# Altium PCB PCB1.PcbDoc (part 2 of 2)
Units mil, origin at the board's own origin, x right, y up, seen from the top; angles counter-clockwise.
Board outline 2301.37 x 4029.64 mil, 2 copper layers (Top Layer, Bottom Layer); 103 components, 112 nets, 474 pads, 173 vias.
Unrouted connection lines stored in the file: 1.
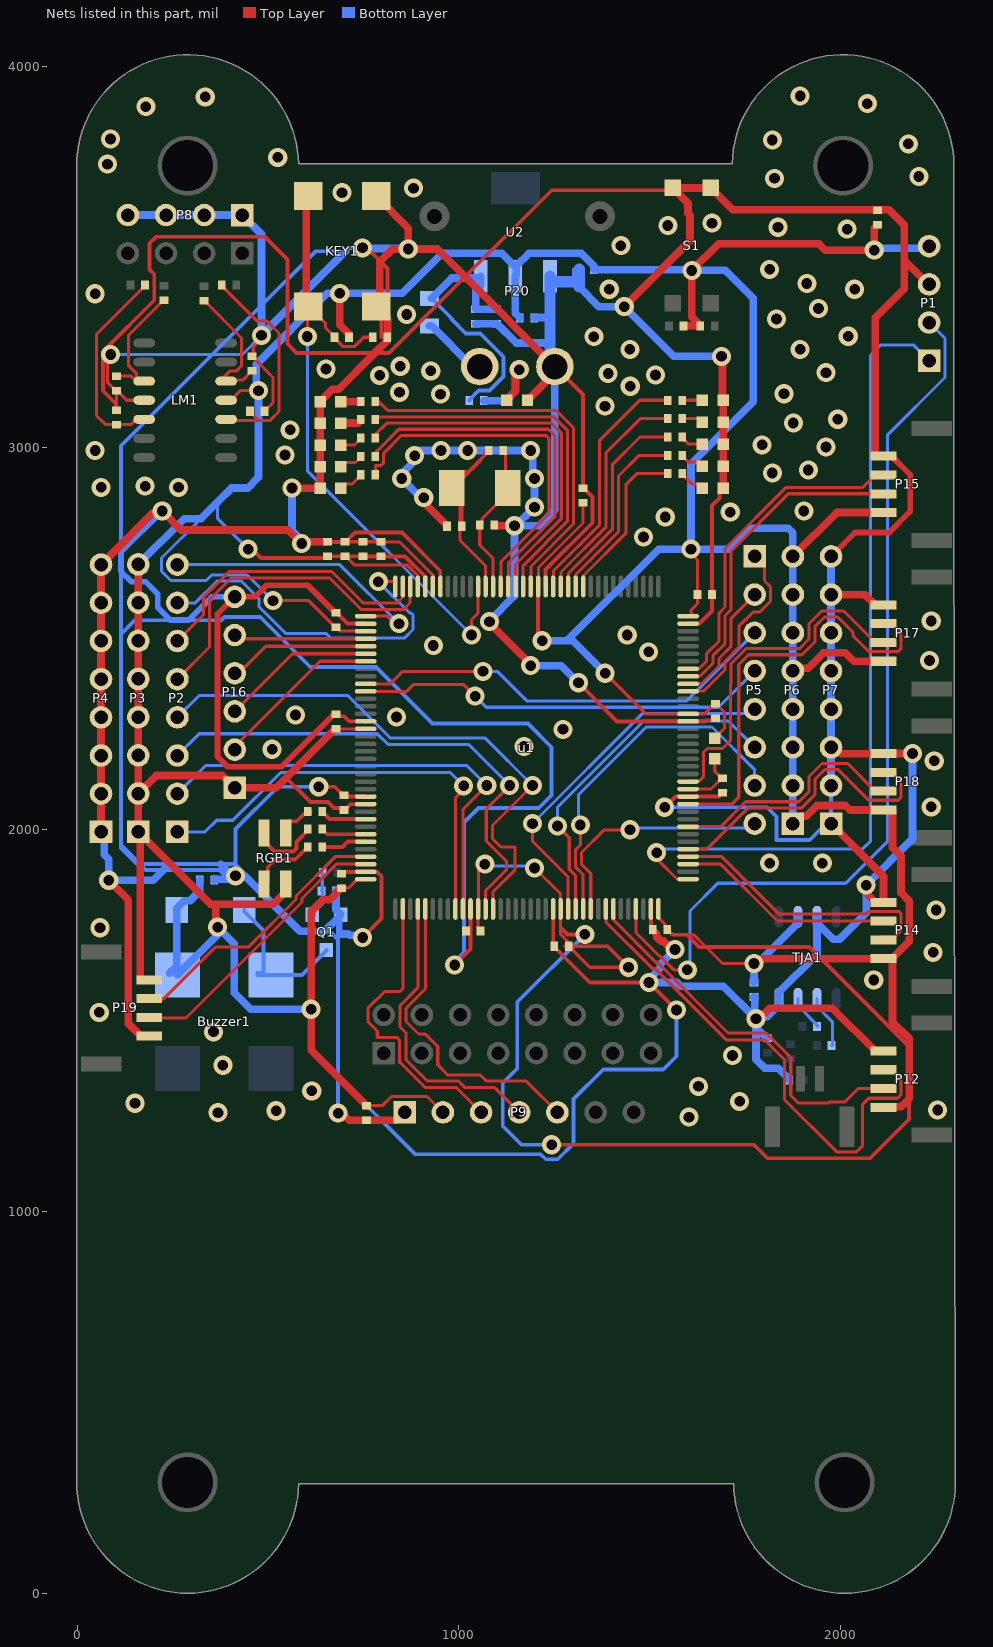
[diagram p2: the nets of this part, all layers, seen from the top]

## Via types
v1: diameter 50, hole 28, Top Layer to Bottom Layer, 173 vias

## Nets (pads, with @x,y where several pads share a name; then routed paths per layer and width w, separated by ;. In a path a pad name is that pad's centre, name@x,y a point inside that pad or via, vN(x,y) a via of type N, cw(c..) or ccw(c..) an arc to the next point about the centre after c; other vN are vias at no path point) (continued)
GND: C1.2 C2.1 C3.2 C4.2 C5.1 C6.1 C7.2 C8.1 C9.1 C10.1 C11.1 C12.1 C13.1 C14.1 C15.1 C16.1 C17.1 C18.1 C19.1 C20.1 C21.1 C22.1 C23.1 C24.1 C25.2 C26.2 C27.2 C28.2 KEY1.1 KEY1.2 LED1.2 LED2.2 LED3.2 LED4.2 LED5.2 LED6.2 LED7.2 LED8.2 LED9.2 LED10.2 LED11.2 LM1.11 P1.3 P4.1 P4.2 P4.3 P4.4 P4.5 P4.6 P4.7 P4.8 P7.1 P7.2 P7.3 P7.4 P7.5 P7.6 P7.7 P7.8 P8.1 P8.2 P8.3 P8.4 P9.1 P12.4 P14.4 P15.4 P16.6 P17.4 P18.4 P19.4 P20.2 Q1.1 R6.1 R7.1 R9.1 R10.1 R16.1 S1.1 S1.3 TJA1.3 TJA1.8 u1.16 u1.30 u1.31 u1.38 u1.51 u1.61 u1.71 u1.83 u1.94 u1.107 u1.120 u1.130 u1.143 U2.1 | length 32344.5
  Top Layer w8: v1(88,3244.66) 88,3233.29 79.19,3224.48 79.19,3171.66 101.19,3149.66 R9.1@103,3149.66 ; R6.1@101.19,3098.66 R6.1@103,3098.66 R9.1@103,3149.66 ; LM1.11@171.53,3129.66 176.12,3125.07 LM1.11@175.72,3124.66 129.81,3124.66 104.81,3149.66 R9.1@103,3149.66 ; R10.1@458,3239.66 461.37,3243.03 461.37,3263.97 483,3285.6 v1(483,3294.66) ; R10.1@461.44,3237.16 498.94,3199.66 497.7,3199.66 513,3184.36 513,3117.85 R7.1@491,3095.85 ; C24.1@795.8,2753.61 844.92,2753.61 931.59,2666.94 u1.31@931.59,2637.25
  Top Layer w10: R6.1@101.19,3098.66 101.19,3116.47 68,3149.66 68,3252.51 202.07,3386.58 202.07,3454.59 190,3466.66 190,3535.66 207,3552.66 492,3552.66 551,3493.66 551,3272.66 575,3248.66 780.27,3248.66 817,3248.66 1016.29,3447.95 1243,3674.66 1566.07,3674.66 S1.3@1666.07,3674.66 ; v1(633,2112.43) 674.73,2112.43 697.5,2089.66 C17.1@699.31,2089.66 701.85,2089.66 704.46,2087.05 755.41,2087.05 u1.61@755.76,2086.71 ; C22.1@655.64,2753.61 655.79,2753.75 701.85,2753.75 C21.1@702,2753.9 C21.1@703.81,2753.9 ; C19.1@678,2301.87 683,2296.87 699.31,2296.87 712.28,2283.9 755.41,2283.9 u1.51@755.76,2283.56 ; C20.1@678,2568.27 679.81,2568.27 694.81,2553.27 695.2,2553.27 702.81,2545.65 702.81,2545.27 708.27,2539.81 755.41,2539.81 u1.38@755.76,2539.46 ; v1(683.72,1257.38) v1@694.54,1257.38 ; C16.1@693,1884.66 697.85,1889.51 755.41,1889.51 u1.71@755.76,1889.86 756.1,1889.51 785.79,1889.51 797.3,1878 797.3,1766.91 v1(748,1717.61) ; v1(747.29,3523.72) 759.25,3523.72 793,3489.97 794.53,3488.44 813.26,3469.71 KEY1.2@813.26,3336.23 ; C24.1@795.8,2753.61 795.51,2753.9 C23.1@748.84,2753.9 C21.1@703.81,2753.9 ; KEY1.2@812,3342.27 797,3342.27 797,3289.66 C4.2@812,3289.66 812,3283.61 C4.2@813.26,3283.61 ; u1.31@931.59,2637.25 u1.31@931.94,2636.9 ; u1.30@951.62,2636.9 951.28,2637.25 951.28,2677.79 851.12,2777.95 727.87,2777.95 C21.1@703.81,2753.9 ; v1(989,1645.66) 1030.36,1687.02 1030.36,1746.48 ; C18.1@1018.54,1734.66 1030.36,1746.48 ; u1.83@1030.36,1792.42 1030.36,1746.48 ; u1.16@1227.21,2636.9 1227.21,2681.31 1349.72,2803.81 1349.72,2871.5 1342.1,2879.12 1341.72,2879.12 1326.72,2894.12 C10.1@1324.91,2894.12 1324.91,3139.33 P20.2@1251.43,3212.81 ; v1(1313,2384.66) 1414.1,2283.56 u1.130@1600.24,2283.56 1643.79,2283.56 1646.62,2286.39 1666.75,2286.39 C12.1@1671.75,2291.39 ; u1.107@1502.8,1792.42 1503.15,1792.07 1503.15,1742.91 C14.1@1507.87,1738.19 ; v1(1539,2058.66) 1567.05,2086.71 u1.120@1600.24,2086.71 1682.06,2086.71 1696.19,2100.84 C13.1@1698,2100.84 ; v1(1570,1527.66) v1(1498,1599.66) 1342.8,1599.66 1265,1677.46 ; u1.143@1600.24,2539.46 1600.59,2539.81 1630.28,2539.81 1663,2572.53 C11.1@1663,2615.61 1663,2848.73 1682.42,2868.15 1682.42,2884.6 LED2.2@1692.42,2894.6 ; C12.1@1670.71,2289.76 C12.1@1674.06,2287.62 ; P15.4@2090,2978.13 P15.4@2112.02,2978.13 ; 1265,1677.46 1246.9,1695.57 u1.94@1246.9,1792.42 1247.24,1792.07 1247.24,1701.47 1250,1701.47 C15.1@1250,1694.66 1252.35,1692.31 1252.35,1690.5 1265,1677.85 1265,1677.46
  Top Layer w15: C19.1@678,2301.87 675.5,2299.37 669.77,2299.37 535.03,2164.63 394.35,2164.63 367.97,2191.01 367.97,2564.63 P16.6@413,2609.66 465.72,2609.66 496.22,2640.16 604.3,2640.16 676.19,2568.27 C20.1@678,2568.27 ; P7.8@1974.69,2715.61 2037.64,2778.55 2127.27,2778.55 2181.79,2833.07 2181.79,2930.01 2133.67,2978.13 P15.4@2112.02,2978.13
  Top Layer w20: P4.1@62.66,1994.17 P4.2@62.66,2094.17 P4.3@62.66,2194.17 P4.4@62.66,2294.17 P4.5@62.66,2394.17 P4.6@62.66,2494.17 P4.7@62.66,2594.17 P4.8@62.66,2694.17 197.41,2828.92 217.26,2828.92 v1(223,2834.66) 273,2784.66 553,2784.66 v1(588,2749.66) 591.95,2753.61 C22.1@655.64,2753.61 ; v1(83,1867.49) 134.15,1816.35 134.15,1492.37 167.33,1459.19 P19.4@188.98,1459.19 ; v1@570,2894.66 v1(563,2894.66) 563.24,2894.42 636.26,2894.42 LED11.2@636.5,2894.18 LED10.2@636.5,2950.78 LED9.2@636.5,3007.38 LED8.2@636.5,3063.98 LED7.2@636.5,3120.58 655.64,3139.72 655.64,3140.61 668.54,3153.51 685.12,3153.51 780.27,3248.66 812,3280.39 C4.2@812,3283.61 ; v1@694.54,1257.38 712.68,1239.24 C5.1@758,1239.24 837.58,1239.24 P9.1@858,1259.66 ; KEY1.1@783,3659.66 867.37,3575.29 v1(867.37,3520.76) ; 793,3489.97 793,3380.29 KEY1.2@783,3370.29 783.98,3370.29 KEY1.2@812,3342.27 ; 794.53,3488.44 826.86,3520.76 v1(867.37,3520.76) ; C4.2@813.26,3283.61 KEY1.2@813.26,3336.23 ; v1(908,2869.66) 913.74,2863.92 913.74,2851.73 969,2796.47 C3.2@969,2794.66 ; v1(1080.34,2544.66) 1080.34,2540.99 1188,2433.33 v1(1188,2429.66) ; C1.2@1092.57,2797.73 1092.57,2795.91 v1(1145.48,2795.91) ; LED1.2@1179.67,3124.6 1251.43,3196.36 P20.2@1251.43,3212.81 1016.29,3447.95 949.57,3514.66 943.47,3520.76 v1(867.37,3520.76) ; v1(1433,3369.66) 1605.09,3541.75 1605.09,3609.6 1600.03,3614.66 1600.03,3640.71 1566.07,3674.66 S1.1@1560.09,3680.64 S1.3@1660.09,3680.64 1666.07,3674.66 1717.61,3623.13 2126.46,3623.13 2166,3583.59 2166,3491.82 ; C14.1@1507.87,1738.19 1507.87,1736.38 1517.87,1726.38 1517.87,1718.92 1528.42,1708.38 1535.75,1708.38 1558.1,1686.02 v1(1566.22,1686.02) ; v1(1688,3239.66) 1690.21,3237.45 1690.21,3126.74 LED6.2@1692.42,3124.53 LED5.2@1692.42,3067.05 LED4.2@1692.42,3009.56 LED3.2@1692.42,2952.08 LED2.2@1692.42,2894.6 ; v1(1778,1504.66) 1786.12,1504.66 1814.12,1532.66 1978.08,1532.66 2090.36,1420.38 P12.4@2112.02,1420.38 ; P7.1@1974.69,2015.61 2112.02,1878.28 P14.4@2112.02,1809.83 2090.36,1809.83 2072.29,1827.9 2072.29,1848.92 v1(2066.55,1854.66) ; P7.3@1974.69,2215.61 1985.26,2215.61 2001.61,2199.26 P18.4@2112.02,2199.26 2112.22,2199.46 2187.8,2199.46 v1(2188,2199.66) ; P7.7@1974.69,2615.61 2063.45,2615.61 2090.36,2588.7 P17.4@2112.02,2588.7 ; P15.4@2090,2978.13 2090,3340.66 2166,3416.66 2166,3491.82 ; P1.3@2221.01,3436.81 2166,3491.82
  Bottom Layer w8: v1(88,3244.66) 354.19,3244.66 433,3244.66 v1(483,3294.66)
  Bottom Layer w10: v1@397.94,1870.09 373.37,1894.66 226.9,1894.66 180,1894.66 165,1909.66 ; v1(415.09,1879.13) 415.09,1909.57 ; v1(633,2112.43) 525.77,2112.43 415.09,2001.75 415.09,1909.57 ; v1(683.72,1257.38) 683.72,1711.94 ; 690.4,1726.62 Q1.1@690.4,1777.18 683.72,1770.49 683.72,1769.51 683.72,1711.94 ; v1(747.29,3523.72) 712.06,3523.72 703,3514.66 624.19,3514.66 483,3373.47 354.19,3244.66 115,3005.47 115,2511.66 ; v1(989,1645.66) 989,1654.7 1013,1678.7 1013,2024.66 ; 1015.96,2021.7 1050.91,2056.66 1209.32,2056.66 1242.65,2089.99 1242.65,2216.01 1181,2277.66 930.83,2277.66 782.83,2425.66 610.63,2425.66 479.55,2556.74 386.08,2556.74 378,2548.66 152,2548.66 115,2511.66 ; 1301.27,3435.08 1301.27,3467.66 C26.2@1315,3467.66 ; v1(1539,2058.66) 1807,2058.66 1832,2033.66 1832,1972.66 1919,1972.66 1974.69,2028.35 P7.2@1974.69,2115.61 ; v1(1570,1527.66) 1570,1406.66 1535,1371.66 1378,1371.66 1300.53,1294.19 1300.53,1178.45 1258.74,1136.66 1227.26,1136.66 1214.26,1149.66 886,1149.66 684,1351.66 684,1711.66 683.72,1711.94 ; C7.2@1772.9,1561.66 1772.9,1509.76 1772.9,1486.95 1778,1481.85 1783.74,1476.11 ; 115,1959.66 115,2511.66 ; 115,1959.66 165,1909.66 ; 115,1959.66 115,1951.66 157,1909.66 165,1909.66 ; 165,1909.66 241.9,1909.66 376.44,1909.66 415,1909.66 415.09,1909.57 ; 415.09,1909.57 590.87,1733.79 591,1733.66 662,1733.66 683.72,1711.94
  Bottom Layer w15: v1(223,2834.66) 115.26,2726.92 115.26,2676.01 141.63,2649.63 178.93,2649.63 211.47,2617.09 211.47,2581.68 244.01,2549.14 292.29,2549.14 352.8,2609.66 P16.6@413,2609.66
  Bottom Layer w20: P4.1@62.66,1994.17 70.85,1985.98 70.85,1934.64 83,1922.49 v1(83,1867.49) 199.74,1867.49 226.9,1894.66 241.9,1909.66 ; P8.4@133,3609.66 P8.3@233,3609.66 P8.2@333,3609.66 P8.1@433,3609.66 483,3559.66 483,3373.47 v1(483,3294.66) 703,3514.66 ; C6.1@359.5,1868.28 359.5,1870.09 v1@397.94,1870.09 ; 376.44,1909.66 406.97,1879.13 v1(415.09,1879.13) 438.53,1879.13 583.87,1733.79 590.87,1733.79 648,1733.79 Q1.1@683.72,1769.51 ; v1(563,2894.66) 563,2782.78 588,2757.78 v1(588,2749.66) ; R16.1@678,1839.66 678,1790.57 690.4,1778.16 Q1.1@690.4,1777.18 ; 690.4,1726.62 710.4,1726.62 713.68,1723.35 742.26,1723.35 v1(748,1717.61) ; v1(747.29,3523.72) 748.77,3522.24 865.89,3522.24 v1(867.37,3520.76) ; v1(908,2869.66) 900.4,2869.66 v1(850.4,2919.66) 850.4,2932.06 884.05,2965.71 v1(884.05,2979.66) 897.27,2992.87 v1(953,2992.87) v1(1023,2992.87) v1(1188,2992.87) 1193,2987.87 1193,2924.66 v1(1198,2919.66) v1(1198,2844.66) v1@1149.25,2795.91 ; C27.2@1044.06,3324.66 C28.2@1098,3324.66 1099.81,3324.66 1149.81,3274.66 1238.55,3274.66 ; v1(1080.34,2544.66) 1080.34,2547 1145.48,2612.14 v1(1145.48,2795.91) v1@1149.25,2795.91 ; v1(1188,2429.66) 1268,2429.66 v1(1313,2384.66) ; C25.2@1197,3339.66 1197,3341.47 1235.36,3341.47 1238.55,3344.66 ; P20.2@1238.55,3225.68 P20.2@1251.43,3212.81 1251.43,2837.27 1210.07,2795.91 v1@1149.25,2795.91 ; 1315,3421.35 1366.69,3369.66 v1(1433,3369.66) 1563,3239.66 v1(1688,3239.66) ; v1(1566.22,1686.02) 1527.33,1647.13 1527.33,1637.11 1498,1607.78 v1(1498,1599.66) 1570.83,1599.66 1580.61,1589.87 1692.79,1589.87 1772.9,1509.76 v1(1778,1504.66) ; C7.2@1772.9,1561.66 1774.71,1561.66 1774.71,1512.95 1778,1509.66 v1(1778,1504.66) ; 1783.74,1476.11 1806.19,1453.66 C8.1@1808,1453.66 ; C9.1@1865,1344.66 1865,1346.47 1836.72,1374.76 1801.64,1374.76 1778,1398.39 1778,1481.85 v1(1778,1504.66) ; TJA1.3@1938,1771.94 TJA1.3@1938,1755.21 ; P7.1@1974.69,2015.61 P7.1@1974.69,2028.35 ; P7.2@1974.69,2115.61 P7.3@1974.69,2215.61 P7.4@1974.69,2315.61 P7.5@1974.69,2415.61 P7.6@1974.69,2515.61 P7.7@1974.69,2615.61 P7.8@1974.69,2715.61 ; v1(2188,2199.66) 2188,1976.11 v1(2066.55,1854.66) 2066.55,1782.66 1996.84,1712.94 1980.27,1712.94 TJA1.3@1938,1755.21 ; v1(1778,1504.66) 1783.74,1510.4 1807.76,1510.4 1838,1540.64 TJA1.8@1838,1557.38 1838,1574.11 1938,1674.11 TJA1.3@1938,1755.21
  Bottom Layer w30: P20.2@1238.55,3225.68 1238.55,3274.66 1238.55,3344.66 U2.1@1238.55,3437.8 ; U2.1@1238.55,3449.31 U2.1@1238.55,3437.8 ; 1301.27,3435.08 1241.27,3435.08 U2.1@1238.55,3437.8 ; 1315,3421.35 C26.2@1315,3467.66
  other v1: 1602.74,1247.05 369.09,1258.86 521.21,1263.78 2253.94,1265.75 151.57,1283.46 1735.24,1288.39 614.55,1315.94 1627.55,1327.76 381.89,1382.87 1716.54,1408.46 357.28,1470.47 58.07,1521.65 2086.61,1606.3 2242.13,1678.66 60.04,1743.11 2250,1789.37 1813.98,1912.4 1951.77,1912.4 2237.2,2059.66 2245.08,2180.12 510.83,2210.63 1170.28,2217.63 1272.64,2262.8 836.61,2295.28 571.85,2300.2 2232.28,2442.91 1497.05,2465.55 933.07,2482.28 1440.94,2509.66 2237.2,2546.26 1483.27,2766.73 1540.35,2818.9 1710.63,2831.69 1903.54,2834.65 62.99,2896.65 265.75,2896.65 178.15,2899.61 1820.87,2934.06 1915.35,2941.93 544.29,2981.3 47.24,2992.87 1961.61,3001.97 1794.29,3007.87 558.07,3047.24 1875.98,3064.96 1992.13,3074.8 1382.87,3109.25 951.77,3140.75 1851.38,3141.73 844.49,3145.67 1448.82,3161.42 792.32,3189.96 1514.76,3190.94 1390.75,3194.88 1961.61,3196.85 926.18,3201.77 652.03,3206.69 846.46,3213.66 1447.83,3257.87 1893.7,3257.87 1353.35,3291.34 2019.68,3292.32 1831.69,3337.6 863.19,3349.41 1941.93,3365.16 47.24,3403.54 1393.7,3415.35 2036.42,3415.35 1911.42,3430.25 1813.98,3467.52 1424.21,3529.53 2016.73,3572.83 1835.63,3577.76 1547.33,3582.33 1663,3588.58 693.9,3668.31 880.91,3680.12 1826.77,3705.71 2204.72,3710.63 79.72,3743.11 525.59,3760.83 2177.17,3796.26 1820.87,3806.1 87.6,3809.06 180.12,3893.7 2069.88,3901.57 335.63,3919.29 1893.7,3921.26
I2C1_SCL: P15.2 u1.136 | length 854.3
  Top Layer w8: u1.136@1600.24,2401.67 1600.97,2402.4 1632.19,2402.4 1665,2435.21 1665,2455.15 1697,2487.15 1697,2560.54 1713,2576.54 1713,2729.94 1862.77,2879.71 P15.2@2112.02,2879.71
I2C1_SDA: P15.3 u1.137 | length 866.5
  Top Layer w8: u1.137@1600.24,2421.35 1600.97,2422.08 1629.25,2422.08 1649,2441.83 1649,2461.78 1681,2493.78 1681,2567.17 1697,2583.17 1697,2736.57 1856.14,2895.71 2057.15,2895.71 2090.36,2928.92 P15.3@2112.02,2928.92
I2C2_SCL: P19.2 u1.69 | length 728.4
  Top Layer w8: P19.2@203.98,1555.92 225.64,1555.92 362.03,1692.31 448.29,1692.31 573.31,1817.33 573.31,1826.38 676.16,1929.23 u1.69@755.76,1929.23
  Top Layer w10: P19.2@188.98,1557.61 203.98,1557.61 P19.2@203.98,1555.92
I2C2_SDA: P19.3 u1.70 | length 740.6
  Top Layer w8: P19.3@203.98,1506.71 285.31,1506.71 589.31,1810.7 589.31,1819.75 679.1,1909.54 u1.70@755.76,1909.54
  Top Layer w10: P19.3@188.98,1508.4 203.98,1508.4 P19.3@203.98,1506.71
LED0: R20.2 u1.11 | length 435.1
  Top Layer w8: u1.11@1325.64,2636.9 1326.37,2637.63 1326.37,2665.91 1438,2777.54 1438,2904.66 1465.71,2932.37 R20.2@1547.33,2932.37
LED1: R21.2 u1.12 | length 487.5
  Top Layer w8: u1.12@1305.95,2636.9 1306.68,2637.63 1306.68,2668.85 1418,2780.17 1418,2926.29 1472.14,2980.43 R21.2@1547.33,2980.43
LED2: R22.2 u1.13 | length 542.4
  Top Layer w8: u1.13@1286.27,2636.9 1287,2637.63 1287,2671.79 1402,2786.8 1402,2956.04 1474.45,3028.49 R22.2@1547.33,3028.49
LED3: R23.2 u1.14 | length 598.4
  Top Layer w8: u1.14@1266.58,2636.9 1267.31,2637.63 1267.31,2674.74 1384.69,2792.12 1384.69,2986.35 1474.88,3076.54 R23.2@1547.33,3076.54
LED4: R24.2 u1.15 | length 655.2
  Top Layer w8: u1.15@1246.9,2636.9 1247.4,2637.4 1247.4,2677.45 1368.69,2798.74 1368.69,3019.53 1473.76,3124.6 R24.2@1547.33,3124.6
LED5: R25.2 u1.18 | length 1009.9
  Top Layer w8: R25.2@781,3121.76 789.09,3121.76 813.26,3097.6 1255.06,3097.6 1300.12,3052.54 1300.12,2800.88 1188.57,2689.33 1188.57,2637.63 u1.18@1187.84,2636.9
LED6: R26.2 u1.19 | length 978.8
  Top Layer w8: R26.2@781,3073.71 781,3074.66 787,3080.66 1247.5,3080.66 1248.44,3081.6 1284.12,3045.91 1284.12,2807.51 1168.16,2691.55 u1.19@1168.16,2636.9
LED7: R27.2 u1.20 | length 971.2
  Top Layer w8: R27.2@781,3025.65 781,3034.92 810.74,3064.66 1242.75,3064.66 1268.12,3039.29 1268.12,2814.13 1148.47,2694.49 u1.20@1148.47,2636.9
LED8: R28.2 u1.21 | length 958.7
  Top Layer w8: R28.2@781,2977.6 781,2987.04 795.8,3001.84 795.97,3001.84 842.79,3048.66 1234.63,3048.66 1252.12,3031.17 1252.12,2820.76 1129.52,2698.16 1129.52,2637.63 u1.21@1128.79,2636.9
LED9: R29.2 u1.22 | length 970.5
  Top Layer w8: R29.2@781,2929.54 781,2953.78 795.97,2953.78 803,2960.81 803,2986.24 849.42,3032.66 1228,3032.66 1236.12,3024.54 1236.12,2827.39 1109.83,2701.1 1109.83,2637.63 u1.22@1109.1,2636.9
MOSI/D1: P9.4 u1.76 | length 774.7
  Top Layer w8: u1.76@892.57,1792.42 892.57,1585.58 845.47,1538.49 845.47,1483.38 861.47,1467.38 861.47,1397.46 917.8,1341.13 999.16,1341.13 1015.16,1325.13 1092.53,1325.13 P9.4@1158,1259.66
NetBuzzer1_2: Buzzer1.2 D1.2 Q1.3 | length 415.2
  Bottom Layer w10: D1.2@438,1789.66 438,1785.64 488,1735.64 488,1624.66 472,1624.66 472,1619.66 Buzzer1.2@508,1619.66 588.98,1619.66 653,1683.68 Q1.3@653,1684.66
NetC27_1: C27.1 C28.1 F1.1 R18.1 U2.3 | length 726.1
  Bottom Layer w10: F1.1@923,3391.66 928.31,3391.66 980.5,3339.47 980.5,3337.16 1018,3299.66 1055.71,3299.66 1116.79,3238.58 1116.79,3187.04 1080.34,3150.6 1052.17,3150.6 1042.43,3140.86 1042.43,3140.47 1027.43,3125.47 R18.1@1027.43,3123.66
  Bottom Layer w20: F1.1@928.31,3391.66 981.31,3444.66 1052.8,3444.66 U2.3@1057.45,3449.31 1057.45,3424.7 1044.06,3411.31 C27.1@1044.06,3362.66 C28.1@1098,3362.66
NetLED1_1: LED1.1 R18.2 | length 246.7
  Top Layer w20: LED1.1@1125.17,3124.66 1130.17,3129.66 1130.17,3130.55 1149.27,3149.66 1149.27,3195.93 v1(1158,3204.66)
  Bottom Layer w20: R18.2@1065.43,3123.66 1123,3123.66 1147.26,3147.92 1147.26,3193.92 v1(1158,3204.66)
NetLED2_1: LED2.1 R20.1 | length 69.3
  Top Layer w8: R20.1@1585.33,2932.37 1585.33,2930.56 1610.23,2905.66 1626.92,2905.66 LED2.1@1637.92,2894.66
NetLED3_1: LED3.1 R21.1 | length 65.4
  Top Layer w8: R21.1@1585.33,2980.43 1585.33,2978.62 1600.8,2963.14 1626.92,2963.14 LED3.1@1637.92,2952.14
NetLED4_1: LED4.1 R22.1 | length 61.5
  Top Layer w8: R22.1@1585.33,3028.49 1585.33,3026.67 1602.37,3009.63 LED4.1@1637.92,3009.63
NetLED5_1: LED5.1 R23.1 | length 56.5
  Top Layer w8: R23.1@1585.33,3076.54 1628.49,3076.54 LED5.1@1637.92,3067.11
NetLED6_1: LED6.1 R24.1 | length 52.6
  Top Layer w8: R24.1@1585.33,3124.6 LED6.1@1637.92,3124.6
NetLED7_1: LED7.1 R25.1 | length 52.9
  Top Layer w20: LED7.1@691,3120.51 691.62,3121.14 743,3121.14 R25.1@743,3121.76
NetLED8_1: LED8.1 R26.1 | length 57.1
  Top Layer w20: LED8.1@691,3063.91 691.98,3064.89 736,3064.89 743,3071.89 R26.1@743,3073.71
NetLED9_1: LED9.1 R27.1 | length 60.7
  Top Layer w8: LED9.1@691,3007.31 726.48,3007.31 743,3023.84 R27.1@743,3025.65
NetLED10_1: LED10.1 R28.1 | length 64.2
  Top Layer w8: LED10.1@691,2950.72 702,2961.72 728.93,2961.72 743,2975.78 R28.1@743,2977.6
NetLED11_1: LED11.1 R29.1 | length 67.7
  Top Layer w8: LED11.1@691,2894.12 702,2905.12 720.39,2905.12 743,2927.73 R29.1@743,2929.54
NetLM1_3: LM1.3 R7.2 R8.1 | length 591.1
  Top Layer w8: R8.1@379,3426.16 379,3424.35 471.69,3331.66 498.33,3331.66 529,3300.99 529,3095.07 505.97,3072.04 475,3072.04 ; LM1.3@390.28,3074.66 392.91,3072.04 475,3072.04 ; R7.2@453,3095.85 453,3094.04 475,3072.04
NetLM1_5: LM1.5 R10.2 R11.1 | length 380.9
  Top Layer w8: R11.1@333,3385.66 430.83,3287.83 430.83,3214.8 416.88,3200.85 399.74,3200.85 373.55,3174.66 LM1.5@390.28,3174.66 392.78,3177.16 433.5,3177.16 R10.2@458,3201.66
NetLM1_10: LM1.10 R9.2 R12.1 | length 358
  Top Layer w8: R9.2@103,3187.66 141.76,3187.66 154.76,3174.66 LM1.10@163.21,3174.66 ; LM1.10@192.45,3174.66 LM1.10@175.72,3174.66 175.31,3174.66 LM1.10@163.21,3174.66 ; R12.1@228,3386.66 226.19,3386.66 135.17,3295.64 135.17,3214.8 156,3193.98 156,3181.88 LM1.10@163.21,3174.66
NetLM1_12: LM1.12 R5.2 R6.2 | length 534.8
  Top Layer w8: LM1.12@154.76,3074.66 140.76,3060.66 R6.2@103,3060.66 74.67,3060.66 51,3084.33 51,3297.35 178,3424.35 R5.2@178,3426.16
  Top Layer w10: LM1.12@154.76,3074.66 LM1.12@175.72,3074.66
NetQ1_2: Q1.2 R13.2 R16.2 | length 172.3
  Bottom Layer w8: Q1.2@615.6,1778.16 643,1805.57 R13.2@643,1888.28 641.5,1886.78 641.5,1841.16 R16.2@640,1839.66
  Bottom Layer w20: Q1.2@615.6,1777.18 Q1.2@615.6,1778.16
NetR14_1: R14.1 TJA1.7 | length 95
  Bottom Layer w8: TJA1.7@1888,1557.38 1888,1538.47 1939.91,1486.57 R14.1@1938,1484.66
NetR15_1: R15.1 TJA1.6 | length 141.3
  Bottom Layer w8: TJA1.6@1938,1557.38 1938,1536.97 1978,1496.97 1978,1434.66 R15.1@1976,1434.66
NetR19_1: R19.1 RGB1.2 | length 174.7
  Top Layer w10: RGB1.2@489.46,1857.73 499.22,1867.49 499.22,1901.62 519.77,1922.16 571.5,1922.16 R19.1@604,1954.66
NetR30_2: R30.2 RGB1.3 | length 129.4
  Top Layer w10: RGB1.3@546.54,1991.59 546.54,2012.26 556.31,2022.02 575.36,2022.02 593,2039.66 ; R30.2@610.06,2041.28 R30.2@607.6,2043.74 ; 593,2039.66 604.63,2040.77 R30.2@607.6,2043.74 ; 593,2039.66 600.68,2047.34 R30.2@604,2047.34 ; R30.2@604,2047.34 611.2,2047.34 R30.2@607.6,2043.74 ; R30.2@604,2047.34 R30.2@607.6,2043.74
NetR31_2: R31.2 RGB1.4 | length 188.9
  Top Layer w10: RGB1.4@489.46,1991.59 489.46,1970.92 517.22,1943.16 566.69,1943.16 574.31,1950.77 574.31,1967.83 606.87,2000.39 604.9,2002.15 604,2002.96 R31.2@604,2001.15
NRST: C4.1 KEY1.3 KEY1.4 R2.1 u1.25 | length 1698.7
  Top Layer w8: v1(603,3291.47) 603,3367.46 KEY1.4@605.83,3370.29 ; KEY1.4@606.82,3370.29 650.55,3326.56 650.55,3314.92 674,3291.47 R2.1@674,3289.66 674,3287.85 696,3265.85 726.97,3265.85 750.78,3289.66 C4.1@774,3289.66 ; v1(1033,2509.66) 1033,2549.64 1050.05,2566.69 u1.25@1050.05,2636.9
  Top Layer w20: KEY1.3@605.83,3659.66 600,3653.83 600,3376.12 KEY1.4@605.83,3370.29 KEY1.4@606.82,3370.29
  Bottom Layer w8: v1(603,3291.47) 603,2939.66 v1(1033,2509.66)
OSC_IN: C1.1 R1.2 u1.23 x1.1 | length 507.2
  Top Layer w8: u1.23@1089.42,2611.9 u1.23@1089.42,2636.9 1089.42,2710.82 1054.57,2745.67 C1.1@1054.57,2797.73 1060.57,2803.73 1060.57,2814.05 1127.41,2880.88 x1.1@1127.41,2894.66 x1.1@1118.39,2885.64 ; R1.2@1122.1,2983.64 1122.1,2908.97 x1.1@1136.41,2894.66 ; x1.1@1147.41,2889.66 x1.1@1147.41,2903.44
  Top Layer w10: R1.2@1116,2992.87 1122.1,2992.87 R1.2@1122.1,2983.64 ; x1.1@1118.39,2885.64 1122.41,2889.66 x1.1@1147.41,2889.66 ; x1.1@1127.41,2894.66 1131.41,2898.66 1132.41,2898.66 x1.1@1136.41,2894.66
OSC_OUT: C3.1 R1.1 u1.24 x1.2 | length 670.2
  Top Layer w8: 1056.27,2967.85 1056.27,2969.19 ; 1056.27,2969.66 1056.27,2969.19 ; u1.24@1069.73,2611.9 u1.24@1069.73,2636.9 1069.73,2691.38 1003.03,2758.08 1003.03,2873.37 x1.2@981.74,2894.66 981.74,2908.44 1011.2,2937.9 1024.98,2937.9 1056.27,2969.19 ; R1.1@1073.01,2996.11 1068.93,2992.03 1068.93,2981.85 1056.27,2969.19
  Top Layer w10: C3.1@1007,2794.66 1007,2918.58 1056.27,2967.85 ; R1.1@1073.01,2996.11 1073.01,2992.87 R1.1@1078,2992.87
RES: P9.5 u1.77 | length 839
  Top Layer w8: u1.77@912.25,1792.42 912.25,1582.64 861.47,1531.86 861.47,1497.46 894.27,1464.66 911.73,1464.66 944.53,1431.86 944.53,1384.1 971.49,1357.13 1056.54,1357.13 1072.54,1341.13 1176.53,1341.13 P9.5@1258,1259.66
RGB_B: R19.2 u1.67 | length 119.5
  Top Layer w10: R19.2@642,1954.66 694.94,1954.66 708.88,1968.6 u1.67@755.76,1968.6
RGB_G: R31.1 u1.66 | length 119.4
  Top Layer w10: R31.1@642,2001.15 655.21,1987.94 755.41,1987.94 u1.66@755.76,1988.28
RGB_R: R30.1 u1.64 | length 121.9
  Top Layer w10: R30.1@642,2047.34 661.34,2028 755.41,2028 u1.64@755.76,2027.65
SCK/D0: P9.3 u1.74 | length 795.3
  Top Layer w8: u1.74@853.2,1792.42 853.2,1583.65 845.47,1575.93 805.54,1575.93 761.47,1531.86 761.47,1497.46 786.1,1472.84 786.1,1456.19 837.5,1456.19 844.53,1449.16 844.53,1390.83 845.47,1390.83 911.17,1325.13 992.53,1325.13 P9.3@1058,1259.66
SPI1_MISO: P16.3 u1.42 | length 405.3
  Top Layer w8: P16.3@413,2309.66 564.06,2460.72 u1.42@755.76,2460.72
SPI1_MOSI: P16.2 u1.43 | length 443.4
  Top Layer w8: P16.2@413,2209.66 415.09,2211.75 415.09,2220.02 636.11,2441.04 u1.43@755.76,2441.04
SPI1_NSS: P16.5 u1.40 | length 346.8
  Top Layer w8: P16.5@413,2509.66 422.66,2500 755.66,2500 u1.40@755.76,2500.09
SPI1_SCK: P16.4 u1.41 | length 372.1
  Top Layer w8: P16.4@413,2409.66 423,2409.66 493.75,2480.41 u1.41@755.76,2480.41
SWCLK: P1.1 u1.109 | length 2143.4
  Top Layer w8: v1(1518,1939.66) 1526.04,1931.62 1526.04,1916.1 1571.24,1870.9 1599.52,1870.9 u1.109@1600.24,1870.17
  Bottom Layer w8: v1@1517.69,1949.66 2058,1949.66 2078,1969.66 2078,3242.22 2105.56,3269.78 2190.01,3269.78 P1.1@2231.54,3228.24
SWDIO: P1.2 u1.105 | length 2429.7
  Top Layer w8: 1464.16,1763.41 1464.16,1791.69 u1.105@1463.43,1792.42 1463.43,1730.45 1525.22,1668.66 1526.58,1668.66 1562.37,1632.87 v1(1598.43,1632.87)
  Bottom Layer w8: v1@1605.09,1655.4 1605.09,1786.75 1678,1859.66 2013,1859.66 2123,1969.66 2123,3034.27 2273.07,3184.34 2273.07,3286.72 P1.2@2231.54,3328.24
TIM3_CH1: P5.1 u1.134 | length 493.9
  Top Layer w8: u1.134@1600.24,2362.3 1600.97,2363.03 1641.37,2363.03 1697,2418.66 1697,2441.9 1733.17,2478.06 1733.17,2532.81 1770.02,2569.66 1787.48,2569.66 1816.22,2598.41 1816.22,2636.24 1800.22,2652.24 1800.22,2690.08 P5.1@1774.69,2715.61
TIM3_CH2: P5.2 u1.135 | length 325.9
  Top Layer w8: u1.135@1600.24,2381.98 1600.97,2382.71 1635.13,2382.71 1681,2428.58 1681,2448.52 1713,2480.52 1713,2553.91 P5.2@1774.69,2615.61
TIM3_CH3: P5.3 u1.46 | length 1138.9
  Top Layer w8: u1.46@755.76,2381.98 820.32,2381.98 853,2414.66 v1(1063,2414.66)
  Bottom Layer w8: v1(1063,2414.66) 1100.71,2414.66 1178.71,2336.66 1595.75,2336.66 P5.3@1774.69,2515.61
TIM3_CH4: P5.4 u1.47 | length 1089.9
  Top Layer w8: u1.47@755.76,2362.3 863.31,2362.3 880.63,2379.61 1012.47,2379.61 v1(1042.43,2349.66)
  Bottom Layer w8: v1(1042.43,2349.66) 1071.43,2320.66 1679.75,2320.66 P5.4@1774.69,2415.61
TIM4_CH1: P2.1 u1.81 | length 1159.8
  Top Layer w8: u1.81@990.99,1792.42 990.99,2083.8 1012.46,2105.26 v1(1012.46,2114.66)
  Bottom Layer w8: P2.1@262.66,1994.17 335.18,1994.17 365.67,2024.66 408,2024.66 533,2149.66 977.46,2149.66 v1(1012.46,2114.66)
TIM4_CH2: P2.2 u1.82 | length 1211.7
  Top Layer w8: u1.82@1010.68,1792.42 1010.68,2053.28 v1(1073.01,2115.61)
  Bottom Layer w8: P2.2@262.66,2094.17 336.63,2168.13 1020.48,2168.13 v1(1073.01,2115.61)
TIM4_CH3: P2.3 u1.85 | length 1343.9
  Top Layer w8: u1.85@1069.73,1792.42 1069.73,1840.26 1125.17,1895.69 1125.17,1916.64 1071.63,1970.17 1071.63,2054.24 v1(1133,2115.61)
  Bottom Layer w8: P2.3@262.66,2194.17 319.68,2251.19 786.52,2251.19 814.31,2223.4 1025.21,2223.4 v1(1133,2115.61)
TIM4_CH4: P2.4 u1.86 | length 1488.7
  Top Layer w8: u1.86@1089.42,1792.42 1089.42,1837.32 1147.41,1895.31 1147.41,1954.59 1109.84,1954.59 1088.17,1976.26 1088.17,2010.77 v1(1193,2115.61)
  Bottom Layer w8: P2.4@262.66,2294.17 319.68,2351.19 709.15,2351.19 820.67,2239.66 1068.95,2239.66 v1(1193,2115.61)
TIM5_CH1: P2.5 u1.34 | length 878.2
  Top Layer w8: P2.5@262.66,2394.17 346.8,2478.31 346.8,2602.19 404.27,2659.66 661,2659.66 743.61,2577.05 855.61,2577.05 872.15,2593.6 872.15,2637.63 u1.34@872.88,2636.9
TIM5_CH2: P2.6 u1.35 | length 761.9
  Top Layer w8: P2.6@262.66,2494.17 330.8,2562.31 330.8,2608.82 397.64,2675.66 667.63,2675.66 750.23,2593.05 837.62,2593.05 852.47,2607.9 852.47,2636.17 u1.35@853.2,2636.9
TIM5_CH3: P2.7 u1.36 | length 983
  Top Layer w8: P2.7@262.66,2594.17 P2.7@273.79,2605.3 ; v1(789.09,2649.66) 831.75,2649.66 833.51,2647.9 u1.36@833.51,2636.9 u1.36@833.51,2615.3
  Bottom Layer w8: P2.7@262.66,2594.17 309.74,2594.17 366.75,2651.19 430.2,2651.19 476,2605.39 476,2584.33 547.03,2513.3 652.73,2513.3 663.57,2502.46 858.33,2502.46 880,2524.14 880,2562.97 875.31,2567.66 871.09,2567.66 v1(789.09,2649.66)
TIM5_CH4: P2.8 u1.37 | length 762.5
  Top Layer w8: u1.37@733.12,2559.15 u1.37@755.76,2559.15 811.95,2559.15 831.63,2539.46 v1(843,2539.46)
  Bottom Layer w8: P2.8@262.66,2694.17 688.29,2694.17 v1(843,2539.46)
TIM8_CH1: P5.5 u1.96 | length 968.2
  Top Layer w8: v1(1193,2015.61) 1193,1969.45 1286.27,1876.18 u1.96@1286.27,1792.42
  Bottom Layer w8: v1(1193,2015.61) 1193,2016.3 1481.36,2304.66 1763.75,2304.66 P5.5@1774.69,2315.61
TIM8_CH2: P5.6 u1.97 | length 925
  Top Layer w8: v1(1258,2009.66) 1289,1978.66 1289,1896.08 1305.95,1879.13 u1.97@1305.95,1792.42
  Bottom Layer w8: v1(1258,2009.66) 1258,2058.67 1483.99,2284.66 1705.64,2284.66 P5.6@1774.69,2215.61
TIM8_CH3: P5.7 u1.98 | length 937.7
  Top Layer w8: v1(1318,2012.02) 1318,1959.61 1305,1946.61 1305,1902.71 1324.91,1882.8 1324.91,1793.14 u1.98@1325.64,1792.42
  Bottom Layer w8: v1(1318,2012.02) 1312.72,2017.3 1312.72,2090.76 1490.62,2268.66 1662.91,2268.66 1774.69,2156.88 P5.7@1774.69,2115.61
TIM8_CH4: P5.8 u1.99 | length 642.7
  Top Layer w8: u1.99@1345.32,1792.42 1345.32,1885.01 1321,1909.33 1321,1939.99 1380.67,1999.66 v1(1448,1999.66)
  Bottom Layer w8: v1(1448,1999.66) 1453,2004.66 1763.75,2004.66 P5.8@1774.69,2015.61
UART4_RX: P14.2 u1.112 | length 742.7
  Top Layer w8: u1.112@1600.24,1929.23 1688.39,1929.23 1837.95,1779.66 2067.23,1779.66 2073.58,1786.01 2151.96,1786.01 2157.48,1780.49 2157.48,1735.21 2141.48,1719.21 2103,1719.21 2110.81,1711.4 P14.2@2112.02,1711.4
UART4_TX: P14.3 u1.111 | length 573.5
  Top Layer w8: u1.111@1600.24,1909.54 1685.44,1909.54 1834.37,1760.61 P14.3@2112.02,1760.61
UART5_RX: P18.2 u1.116 | length 633.6
  Top Layer w8: u1.116@1600.24,2007.97 1685.7,2007.97 1750.86,2073.13 1890.95,2073.13 1917.17,2099.35 1917.17,2139.43 1950.86,2173.13 2018.06,2173.13 2090.36,2100.84 P18.2@2112.02,2100.84
UART5_TX: P18.3 u1.113 | length 800.6
  Top Layer w8: u1.113@1600.24,1948.91 1649.27,1948.91 1757.49,2057.13 1897.58,2057.13 1933.17,2092.72 1933.17,2132.81 1957.49,2157.13 1993.47,2157.13 2073.58,2077.02 2150.45,2077.02 2157.48,2084.05 2157.48,2126.24 2133.67,2150.05 P18.3@2112.02,2150.05
USART1_RX: P12.2 u1.102 | length 996.9
  Top Layer w8: u1.102@1402.6,1779.66 1402.6,1765.92 1515.86,1652.66 1519.95,1652.66 1704.95,1467.66 1805,1467.66 1869.19,1403.47 1869.19,1303.88 1889.1,1283.98 1968.14,1283.98 1970.76,1286.61 2010.49,1286.61 2045.84,1321.95 P12.2@2112.02,1321.95
USART1_TX: P12.3 u1.101 | length 1339.9
  Top Layer w8: u1.101@1384.69,1792.42 1385.42,1791.69 1385.42,1757.24 1506,1636.66 1513.33,1636.66 1700.33,1449.66 1800.37,1449.66 1853,1397.03 1853,1292.89 1989.59,1156.31 2041.39,1156.31 2057.48,1172.4 2057.48,1280.45 2073.58,1296.55 2148.86,1296.55 2157.48,1305.17 2157.48,1347.35 2133.67,1371.16 P12.3@2112.02,1371.16
USART2_RX: P17.2 u1.122 | length 910.6
  Top Layer w8: P17.2@2112.02,2490.27 2090.36,2490.27 2007.5,2573.13 1950.86,2573.13 1917.17,2539.43 1917.17,2499.35 1891.89,2474.08 1751.81,2474.08 1713,2435.27 1713,2382.03 1711.81,2380.84 1711.81,2234.32 1690.12,2212.63 1650.62,2212.63 1640.79,2202.8 1640.79,2138.35 1629.25,2126.81 u1.122@1600.97,2126.81 ; u1.122@1600.97,2126.81 u1.122@1600.24,2126.08 u1.122@1600.97,2126.81
USART2_TX: P17.3 u1.119 | length 1130.8
  Top Layer w8: u1.119@1600.24,2067.02 1600.97,2067.75 1716.09,2067.75 1733,2084.66 1733,2432.64 1758.44,2458.08 1898.52,2458.08 1933.17,2492.72 1933.17,2532.81 1957.49,2557.13 1991.89,2557.13 2032.74,2516.29 2032.74,2507.3 2073.58,2466.46 2150.45,2466.46 2157.48,2473.49 2157.48,2515.67 2133.67,2539.48 P17.3@2112.02,2539.48
VCC: Buzzer1.1 C2.2 C5.2 C6.2 C7.1 C10.2 C11.2 C12.2 C13.2 C14.2 C15.2 C16.2 C17.2 C18.2 C19.2 C20.2 C21.2 C22.2 C23.2 C24.2 C25.1 C26.1 D1.1 LM1.4 P1.4 P3.1 P3.2 P3.3 P3.4 P3.5 P3.6 P3.7 P3.8 P6.1 P6.2 P6.3 P6.4 P6.5 P6.6 P6.7 P6.8 P9.2 P12.1 P14.1 P15.1 P16.1 P17.1 P18.1 P19.1 R2.2 R3.2 R4.1 R32.1 R32.2 RGB1.1 TJA1.2 u1.17 u1.32 u1.33 u1.39 u1.52 u1.62 u1.72 u1.84 u1.95 u1.108 u1.121 u1.131 u1.144 U2.2 | length 19622.6
  Top Layer w8: LM1.4@390.28,3124.66 396.18,3130.55 402.13,3124.6 427.2,3149.66 v1(475,3149.66) ; v1(513,2599.66) 606.8,2599.66 676.19,2530.27 C20.2@678,2530.27 688.49,2519.78 u1.39@755.76,2519.78 ; C19.2@678,2263.87 u1.52@755.76,2263.87 ; C16.2@693,1846.66 710.64,1846.66 734.15,1870.17 u1.72@755.76,1870.17 ; C21.2@703.81,2715.9 726.91,2692.8 864.95,2692.8 891.84,2665.91 891.84,2637.63 u1.33@892.57,2636.9 ; C5.2@758,1277.24 799.55,1277.24 823.5,1301.19 916.47,1301.19 P9.2@958,1259.66 ; C18.2@1056.54,1734.66 1050.05,1741.16 u1.84@1050.05,1792.42 1050.78,1793.15 1050.78,1892.44 v1(1068,1909.66) ; v1(1198,1899.66) 1265.85,1831.81 1265.85,1793.15 u1.95@1266.58,1792.42 1266.58,1743.66 1266.58,1725.44 1287,1705.02 1287,1703.66 C15.2@1278,1694.66 ; u1.17@1207.53,2636.9 1208.26,2637.63 1208.26,2686.39 1324.91,2803.04 C10.2@1324.91,2856.12 ; C15.2@1288,1694.66 1288,1692.85 1294,1686.85 1295.81,1686.85 1343,1639.66 v1(1444.09,1639.66) ; v1(1383,2409.66) 1489.42,2303.24 u1.131@1600.24,2303.24 1643.79,2303.24 1669.94,2329.39 C12.2@1671.75,2329.39 1673.56,2329.39 1695.81,2307.14 1695.81,2265.29 R32.2@1670.15,2239.63 ; u1.108@1522.49,1792.42 1522.49,1769.78 1539.87,1752.39 1539.87,1744.19 C14.2@1545.87,1738.19 ; 1597.04,1724.66 1615.36,1724.66 1647.36,1692.66 1690.36,1649.66 v1(1772.9,1649.66) ; u1.121@1600.24,2106.39 1660.13,2106.39 C13.2@1688.4,2134.66 ; u1.144@1600.24,2559.15 1617.12,2559.15 1608,2568.27 1608,2574.8 1625,2591.8 C11.2@1625,2615.61 1625,2706.29 1608,2723.29 v1(1608,2734.66) ; R32.1@1670.15,2185.2 R32.1@1670.09,2185.13 1670.09,2152.97 C13.2@1688.4,2134.66 ; C13.2@1690.21,2134.66 C13.2@1688.4,2134.66
  Top Layer w10: v1(448,2734.66) 458.57,2734.66 481.57,2711.66 651.7,2711.66 C22.2@655.64,2715.61 655.93,2715.9 C21.2@702,2715.9 703.81,2715.9 C23.2@748.84,2715.9 ; 548,2135.68 611.54,2072.15 657.38,2072.15 672.87,2056.66 694.31,2056.66 C17.2@699.31,2051.66 700.93,2053.28 702.74,2053.28 716.14,2066.68 755.41,2066.68 u1.62@755.76,2067.02 ; C23.2@748.84,2715.61 C24.2@795.8,2715.61 858.88,2715.61 912.25,2662.24 u1.32@912.25,2636.9 ; u1.17@1207.53,2636.9 1207.53,2515.96 1218,2505.48 v1(1218,2494.66) ; v1(1243,1174.66) 1772.96,1174.66 1808.32,1139.31 2076.65,1139.31 2179,1241.66 2179,1295.58 2179,1431.66 1948.47,1662.19 1918,1692.66 1647.36,1692.66 1629.04,1692.66 1597.04,1724.66 1559.4,1724.66 1552.68,1731.38 1550.87,1731.38 1545.87,1736.38 C14.2@1545.87,1738.19 ; 1266.58,1743.66 1284.58,1725.66 v1(1330,1725.66) ; C15.2@1278,1694.66 C15.2@1288,1694.66 1389.09,1694.66 v1(1444.09,1639.66)
  Top Layer w20: P3.8@160.28,2694.66 P3.7@160.28,2594.66 P3.6@160.28,2494.66 P3.5@160.28,2394.66 P3.4@160.28,2294.66 P3.3@160.28,2194.66 P3.2@160.28,2094.66 ; P19.1@188.98,1606.83 167.33,1606.83 165.52,1608.64 P3.1@165.52,1989.42 ; v1(368,1744.66) 363,1749.66 363,1804.3 ; RGB1.1@546.54,1857.73 546.54,1837.06 513.78,1804.3 363,1804.3 ; C19.2@678,2263.87 676.19,2263.87 548,2135.68 521.98,2109.66 P16.1@413,2109.66 380.96,2141.7 207.32,2141.7 P3.2@160.28,2094.66 ; v1(688,3404.66) 688,3322.93 712,3298.93 R2.2@712,3289.66 ; C16.2@693,1846.66 691.19,1846.66 661.25,1816.72 642.94,1816.72 613,1786.79 v1(613,1529.66) 613,1422.24 756.19,1279.05 756.19,1277.24 C5.2@758,1277.24 ; R3.2@1588.09,3319.66 R4.1@1632.09,3319.66 1632.09,3321.47 1610.09,3343.47 v1(1610.09,3464.66) 1680.09,3534.66 1943,3534.66 1959.85,3517.81 v1(2087.84,3517.81) 2087.84,3575.28 2094.89,3582.33 2094.89,3584.14 C2.2@2096.7,3584.14 ; v1(1772.9,1649.66) 1781.02,1649.66 1793.55,1662.19 1948.47,1662.19 P14.1@2112.02,1662.19 P14.1@2133.67,1662.19 ; P6.1@1874.69,2015.61 1894.22,2035.13 1909.71,2035.13 1937.71,2063.13 2011.68,2063.13 2023.19,2051.62 P18.1@2112.02,2051.62 2133.67,2051.62 2135.48,2049.81 2135.48,1953.45 2158,1930.93 2158,1834.57 2179.48,1813.09 2179.48,1708 P14.1@2133.67,1662.19 ; P6.5@1874.69,2415.61 1882.17,2423.08 1914.95,2423.08 1955.01,2463.13 2011.65,2463.13 2033.72,2441.06 P17.1@2112.02,2441.06 ; P6.8@1874.69,2715.61 1989.58,2830.49 P15.1@2112.02,2830.49 ; P12.1@2112.02,1272.74 2113.83,1274.55 2157.97,1274.55 2179,1295.58 2179.48,1296.06 2179.48,1431.66 2179.48,1453.44 2135.48,1497.44 2135.48,1660.38 P14.1@2133.67,1662.19 ; P3.2@160.28,2094.66 P3.1@160.28,1994.66 P3.1@165.52,1989.42 ; P3.1@165.52,1989.42 350.65,1804.3 363,1804.3
  Bottom Layer w8: 324.42,2814.66 221.14,2711.37 221.14,2676.97 245.46,2652.64 338.19,2652.64 352.74,2667.19 445.47,2667.19 v1(513,2599.66) ; 368,2858.24 368,2814.66 v1(448,2734.66) ; v1@678,3404.66 v1(688,3404.66) ; v1(1068,1909.66) 1073,1904.66 1193,1904.66 v1(1198,1899.66)
  Bottom Layer w10: Buzzer1.1@243,1624.66 243,1633.66 249,1633.66 250.5,1632.16 Buzzer1.1@263,1619.66 ; v1@368,1724.66 v1(368,1744.66) ; v1(1243,1174.66) 1164,1174.66 1115,1223.66 1115,1336.66 1153,1374.66 1153,1548.66 v1(1330,1725.66)
  Bottom Layer w20: P3.8@160.28,2694.66 280.28,2814.66 324.42,2814.66 368,2858.24 404.42,2894.66 447,2894.66 475,2922.66 v1(475,3149.66) 469.26,3155.4 469.26,3195.34 468.97,3195.63 468.97,3218.25 655.38,3404.66 v1@678,3404.66 ; Buzzer1.1@243,1624.66 250.5,1632.16 260.83,1642.49 D1.1@260.83,1789.66 260.83,1793.68 280.76,1813.6 295.75,1813.6 321.5,1839.35 C6.2@321.5,1868.28 ; Buzzer1.1@263,1619.66 v1@368,1724.66 ; v1(368,1744.66) 411.22,1701.44 411.22,1572.88 454.43,1529.66 v1(613,1529.66) ; v1(688,3404.66) 851.72,3404.66 956.68,3509.63 1112.28,3509.63 1148,3473.91 U2.2@1150.5,3476.41 ; C25.1@1159,3339.66 1159,3341.47 1148,3352.47 U2.2@1148,3449.31 1150.5,3451.81 U2.2@1150.5,3476.41 ; v1(1218,2494.66) 1283,2494.66 ; v1(1383,2409.66) 1298,2494.66 1283,2494.66 ; C7.1@1772.9,1599.66 v1(1772.9,1649.66) 1778.64,1655.4 1788.19,1655.4 1888,1755.21 TJA1.2@1888,1771.94 ; P6.1@1874.69,2015.61 P6.2@1874.69,2115.61 P6.3@1874.69,2215.61 P6.4@1874.69,2315.61 P6.5@1874.69,2415.61 P6.6@1874.69,2515.61 P6.7@1874.69,2615.61 P6.8@1874.69,2715.61 1874.69,2777.97 1863,2789.66 1763,2789.66 1708,2734.66 v1(1608,2734.66) ; v1(2087.84,3517.81) 2093.06,3523.03 2226.33,3523.03 P1.4@2231.54,3528.24 ; U2.2@1150.5,3476.41 1183.72,3509.63 1320.3,3509.63 1353,3476.93 C26.1@1353,3467.66 1353,3466.16 1608.59,3466.16 v1(1610.09,3464.66) 1698,3464.66 1771,3391.66 1771,3121.1 1608,2958.1 v1(1608,2734.66) ; 1283,2494.66 1523,2734.66 v1(1608,2734.66)
VCC_IN: F1.2 P20.1 | length 205.5
  Top Layer w10: P20.1@1054.57,3212.81 1054.57,3205.66 1055.69,3205.66 P20.1@1055.69,3203.92
  Top Layer w20: P20.1@1055.69,3203.92 1059.58,3207.81 P20.1@1069.57,3217.81
  Bottom Layer w20: F1.2@923,3319.66 928.31,3319.66 1035.17,3212.81 P20.1@1054.57,3212.81
pads on no net: Buzzer1.3 Buzzer1.4 P11.0 P12.0 P14.0 P15.0 P17.0 P18.0 P19.0 P20.0 TJA1.5 u1.1 u1.2 u1.3 u1.4 u1.5 u1.6 u1.7 u1.8 u1.9 u1.10 u1.44 u1.45 u1.49 u1.50 u1.53 u1.54 u1.55 u1.58 u1.59 u1.63 u1.65 u1.68 u1.73 u1.75 u1.80 u1.100 u1.106 u1.110 u1.114 u1.115 u1.117 u1.118 u1.123 u1.133 u1.139 u1.140 u1.141 u1.142 U2.4

## Polygon pours and split planes (outlines as drawn)
GND on Bottom Layer "GND_L02_P008" (solid, remove dead copper, pour order 8): 574.8,3741.14 492,3823.94 492,3921.26 466.54,3921.26 402.56,3985.24 178.15,3985.24 59.06,3866.14 59.06,3764.76 14.76,3720.47 14.76,3626.97 1.97,3614.17 12.8,3603.35 12.8,1096.46 375,1096.46 424.21,1047.24 441.93,1064.96 1655.33,1064.96 1670.09,1079.72 1678.95,1070.87 2246.06,1070.87 2246.06,1104.33 2297.24,1155.51 2288.39,1164.37 2296.6,3760.83 2185.04,3950.79 2110.24,3950.79 2066.93,3994.09 1902.56,3994.09 1765.75,3857.28 1765.75,3760.83 1737.2,3732.28 1718.5,3732.28
GND on Top Layer "GND_L01_P010" (solid, remove dead copper, pour order 10): 571.85,3741.14 489.05,3823.94 489.05,3921.26 463.58,3921.26 399.61,3985.24 175.2,3985.24 56.1,3866.14 56.1,3764.76 11.81,3720.47 11.81,3626.97 -0.98,3614.17 9.84,3603.35 9.84,1096.46 372.05,1096.46 421.26,1047.24 438.98,1064.96 1652.37,1064.96 1667.14,1079.72 1676,1070.87 2243.11,1070.87 2243.11,1104.33 2294.29,1155.51 2285.43,1164.37 2293.64,3760.83 2182.09,3950.79 2107.28,3950.79 2063.98,3994.09 1899.61,3994.09 1762.8,3857.28 1762.8,3760.83 1734.25,3732.28 1715.55,3732.28

## Silkscreen, mask and mechanical layers (free items; w line width, h text height)
Top Overlay:
  drawing of 1746 lines, arcs and shapes, not listed
  text "ADC" at 208.66,3845.47 h60
  text "1" at 416.34,3687.99 h60
  text "4" at 110.24,3687.01 h60
  text "0   0" at 1464.57,3662.4 h60
  text "BOOT1" at 1827.76,3383.66 h60 r90
  text "BOOT0" at 1466.54,3365.16 h60 r90
  text "SWD" at 2154.53,3301.18 h60 r90
  text "1    1" at 1475.39,3294.66 h60
  text "RESET" at 568.9,3175.2 h60
  text "6" at 845.47,3076.77 h60
  text "5" at 1447.83,3064.96 h60
  text "I2C1" at 2122.05,3052.17 h20 r90
  text "PF" at 1109.25,3028.54 h60
  text "10" at 829.72,2886.81 h60
  text "1" at 1457.68,2886.81 h60
  text "+ SCL SDA -" at 2058.07,2802.17 h20 r90
  text "TIM3_1" at 1695.87,2790.35 h60
  text "TIM5_4" at 23.62,2771.65 h60
  text "USART2" at 2121.06,2630.91 h20 r90
  text "-  NSS  SCK  MISO  MOSI  +" at 329.72,2615.16 h20 r270
  text "SPI1" at 483.27,2459.65 h60 r270
  text "+ R T -" at 2059.06,2459.65 h20 r90
  text "UART6" at 2109.25,2242.13 h20 r90
  text "+ R T -" at 2055.12,2063.98 h20 r90
  text "UART4" at 2111.22,1892.72 h20 r90
  text "TIM8_4" at 1719.49,1877.95 h60
  text "TIM4_1" at 25.59,1857.28 h60
  text "RGB" at 441.93,1758.86 h60
  text "+ R T -" at 2062.01,1670.28 h20 r90
  text "+ SCL SDA -" at 252.95,1627.95 h20 r270
  text "PG" at 1110.24,1626.97 h60
  text "|" at 1151.57,1546.26 h60
  text "15" at 594.55,1510.83 h60
  text "8" at 1627.55,1500 h60
  text "UASRT1" at 2125.98,1457.68 h20 r90
  text "L H" at 1893.7,1405 h20
  text "0" at 588.58,1383.86 h60
  text "7" at 1635.83,1374.02 h60
  text "|" at 1149.61,1331.69 h60
  text "I2C2" at 64.96,1312.99 h20 r270
  text "+ R T -" at 2059.06,1282.48 h20 r90
  text "OLED" at 1062.01,1107.28 h60
  text "HITSZ" at 1038.39,485.24 h60
  text "Designed by OyJy" at 925.21,351.38 h60
  text "HW_V1.0" at 473.43,348.43 h60
Mechanical 1:
  lines w10: 4.18,290.45 ccw(c289.61,290.45) 575.05,291.39 1723.71,291.39 ; 4.18,294.39 4.18,3050.29 4.18,3739.27 cw(c289.61,3739.27) 575.05,3739.27 1720.72,3739.27 cw(c2006.15,3739.27) 2291.58,3739.27 2291.58,3046.35 2295.52,290.45 cw(c2010.09,290.45) 1724.65,290.45

## Text inside footprints (layer, text, board x,y; h text height)
RGB1: Top Overlay "B" at 496.54,1902.73 h19.68 r90; Top Overlay "G" at 496.54,1932.73 h19.68 r90; Top Overlay "R" at 556.54,1932.73 h19.68 r90